# Altium PCB LineSensorBoardPCBRev2.PcbDoc
Units mm, origin at the board's own origin, x right, y up, seen from the top; angles counter-clockwise.
Board outline 50 x 70 mm, 2 copper layers (Top Layer, Bottom Layer); 77 components, 53 nets, 266 pads, 1 vias.
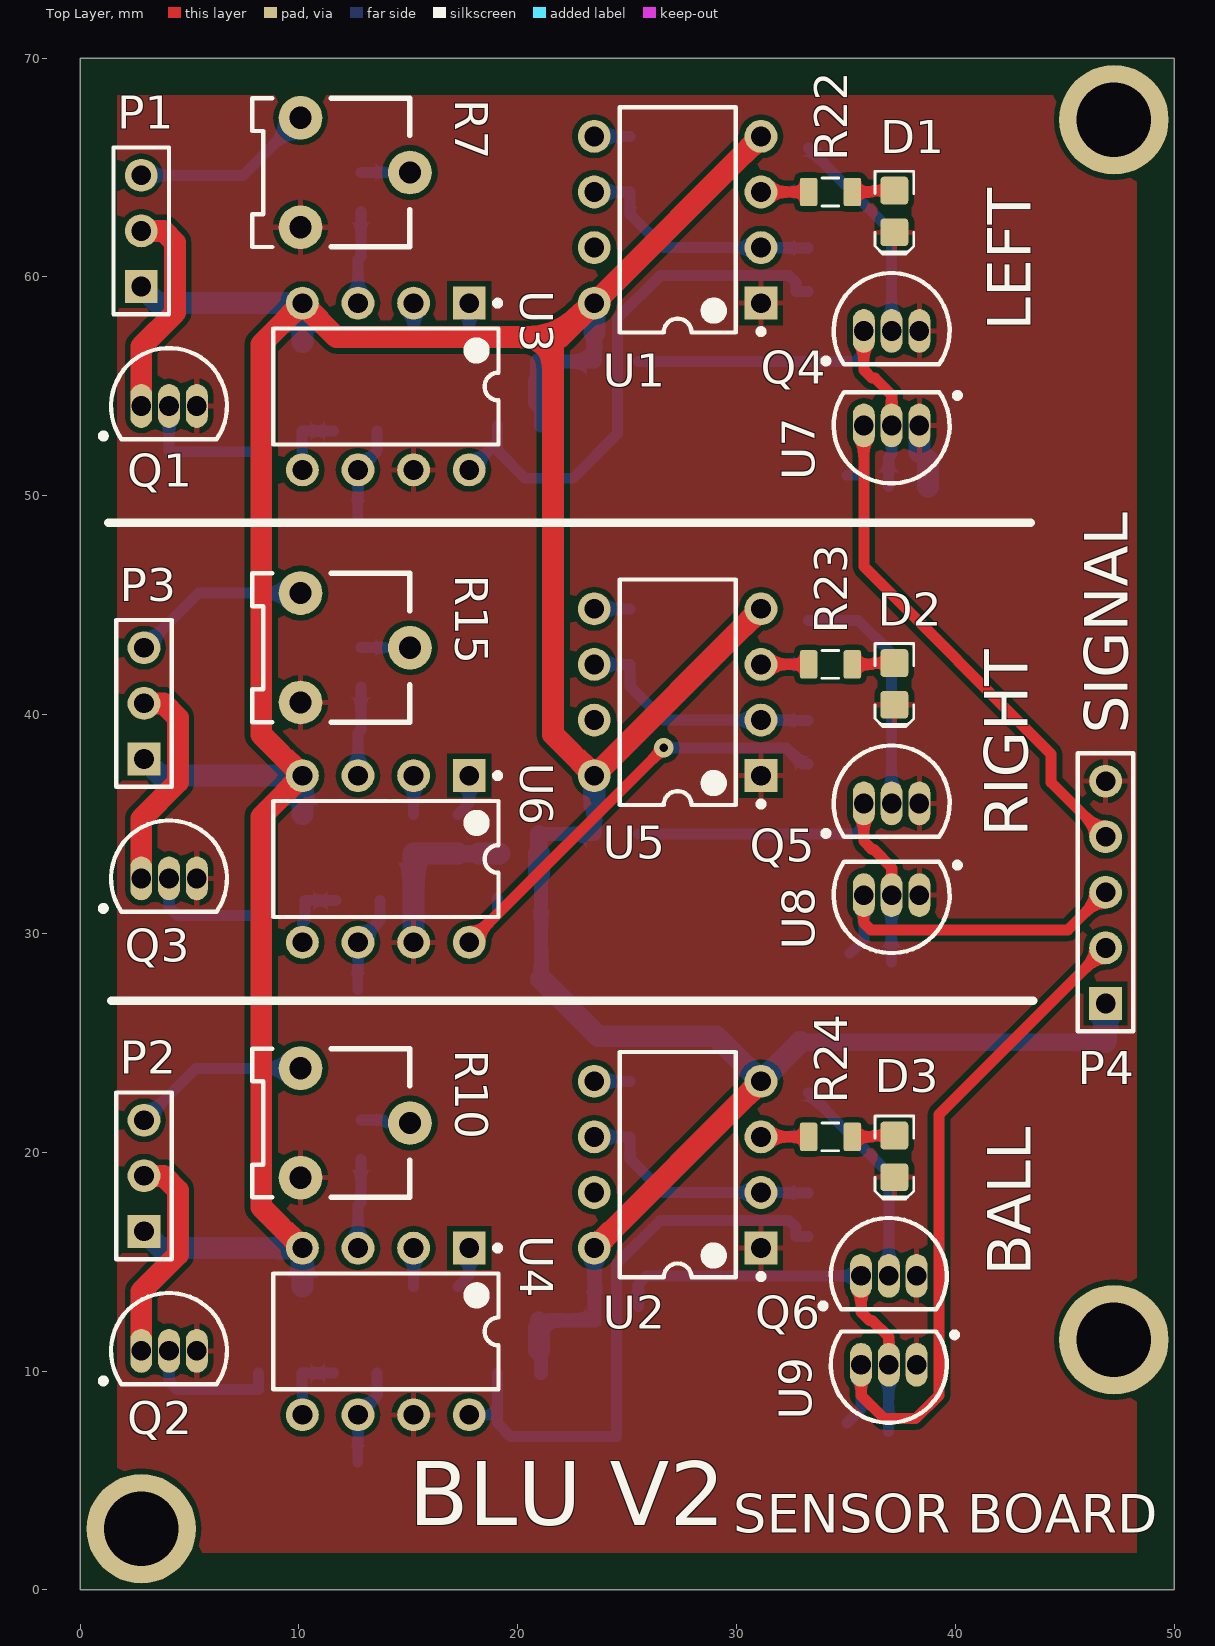
[diagram p0: Top Layer view]
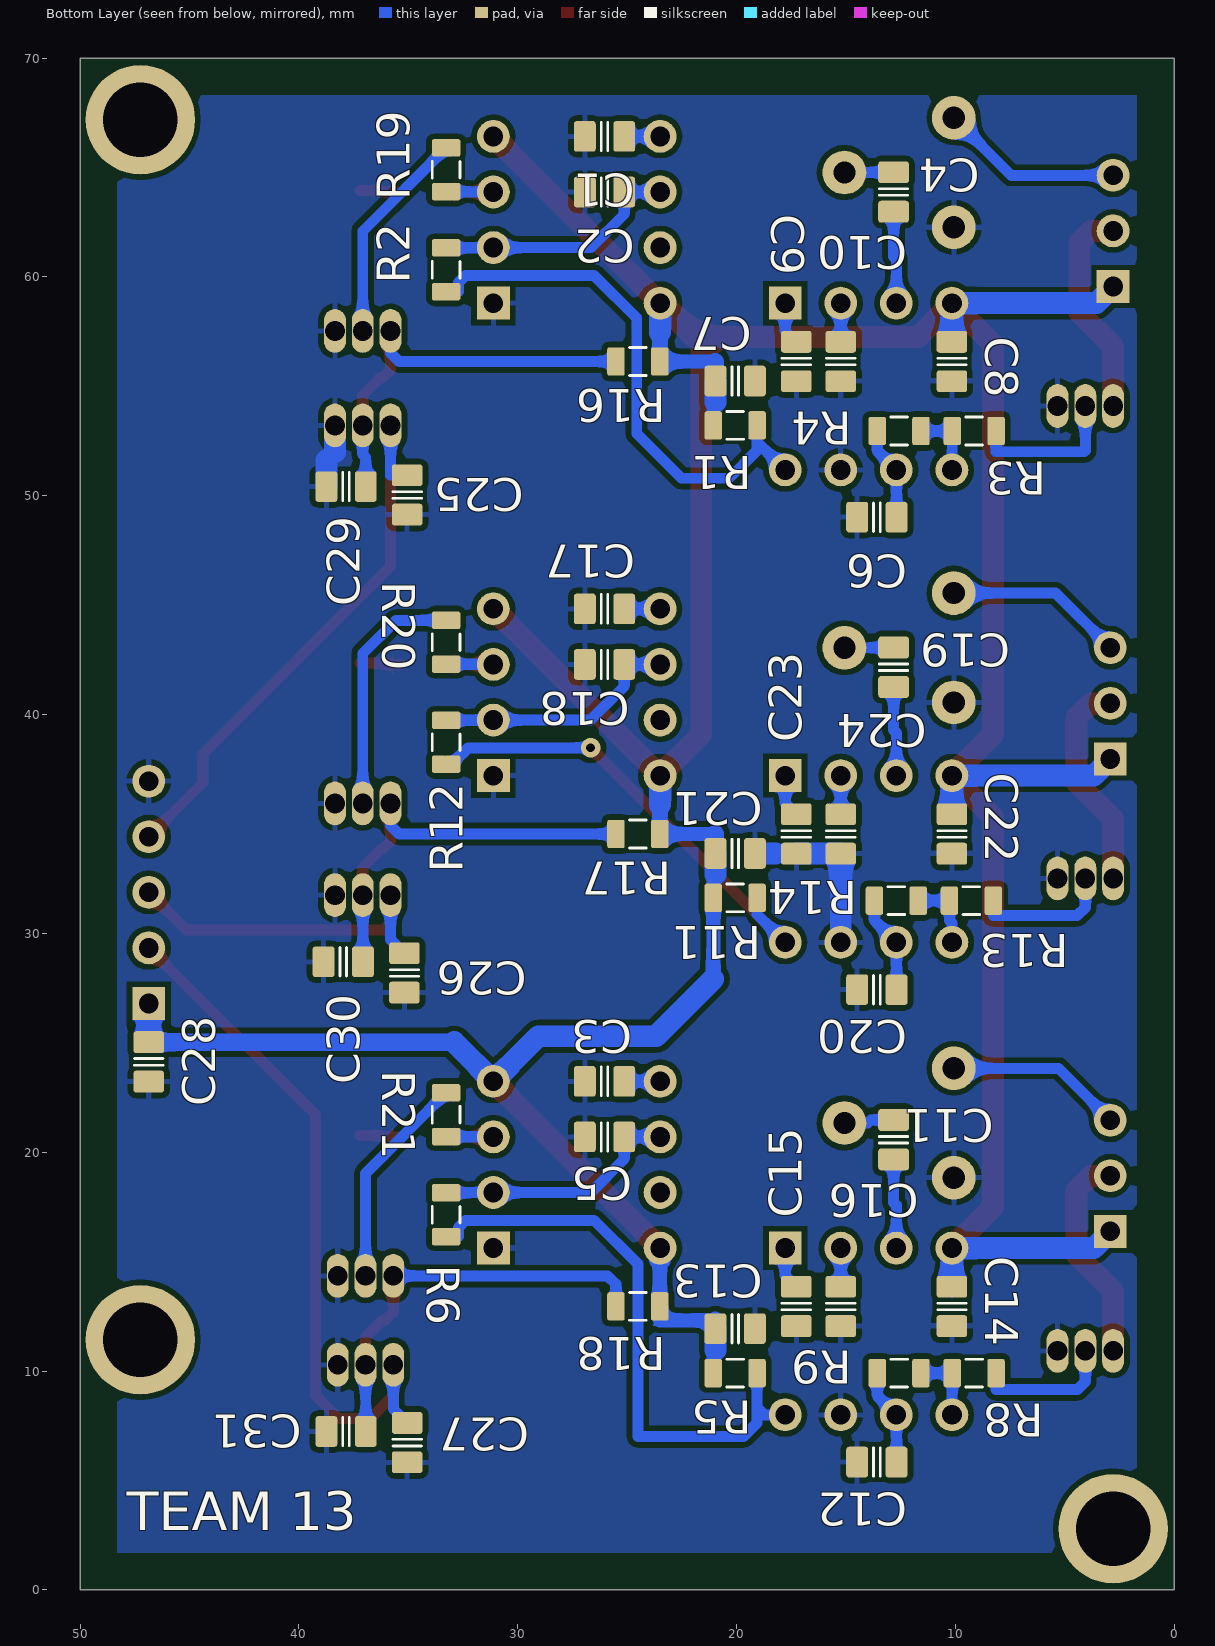
[diagram p1: Bottom Layer view, seen from below]
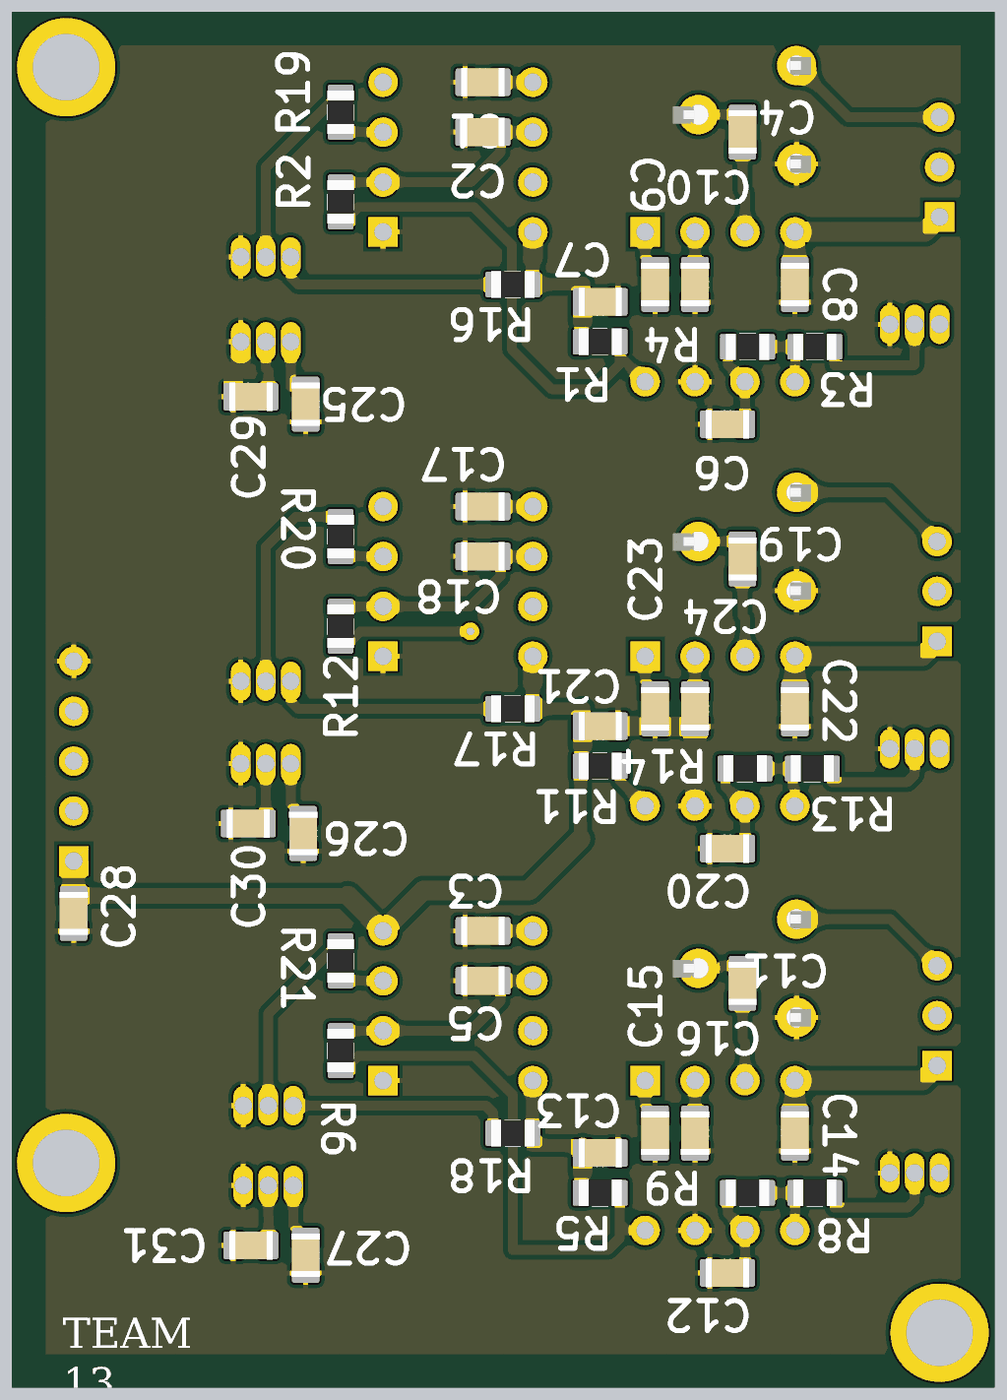
[diagram p2: 3D render of the assembled board from below, using the file's embedded part models]

## Layer stack, top to bottom
Top Solder: solder mask 0.0102, Solder Resist, Dk 3.5
Top Layer: signal copper 0.0356
Dielectric 1: dielectric 0.32, FR-4, Dk 4.8
Bottom Layer: signal copper 0.0356
Bottom Solder: solder mask 0.0102, Solder Resist, Dk 3.5

## Board outline
0,0 50,0 50,70 0,70

## Design rules (kind name [scope] priority, off if disabled: settings)
Clearance [All] p1: gap=0.25
PolygonConnect [All] p1: connectstyle=Relief reliefconductorwidth=0.254 reliefentries=4 polygonreliefangle="90 Angle" airgapwidth=0.254
RoutingVias [All] p1: holewidth=0.4 width=0.9 viastyle="Through Hole" minholewidth=0.711 minwidth=1.27 maxholewidth=0.711 maxwidth=1.27
SMDNeckDown [All] p1: percent=80.000
SolderMaskExpansion [All] p1: expansion=0.102
Width [(InNet('5V') OR InNet('NetP1_2') OR InNet('NetP2_2') OR InNet('NetP3_2') OR InNet('GND'))] p1: maxlimit=1.5 minlimit=0.8 preferedwidth=1 minimp=50.000000 maximp=50.000000 favimp=50.000000
Width Width_All [All] p2: maxlimit=1.5 minlimit=0.3 preferedwidth=0.5 minimp=50.000000 maximp=50.000000 favimp=50.000000
30 further rules are at their usual default settings.

## Components (designator, comment, footprint, x,y, rotation, side; value= is the part's Value field where it differs from the comment)
C1 "approved sub OK" CAPC2012X135N 26.035,66.421 r0 bottom
C2 "approved sub OK" CAPC2012X135N 26.035,63.881 r0 bottom
C3 "approved sub OK" CAPC2012X135N 26.035,23.241 r0 bottom
C4 "approved sub OK" CAPC2012X135N 12.827,63.881 r90 bottom
C5 "approved sub OK" CAPC2012X135N 26.035,20.701 r0 bottom
C6 "approved sub OK" CAPC2012X135N 13.589,49.022 r0 bottom
C7 "approved sub OK" CAPC2012X135N 20.066,55.245 r180 bottom
C8 "approved sub OK" CAPC2012X135N 10.16,56.134 r270 bottom
C9 "approved sub OK" CAPC2012X135N 17.272,56.134 r270 bottom
C10 "approved sub OK" CAPC2012X135N 15.24,56.134 r270 bottom
C11 "approved sub OK" CAPC2012X135N 12.827,20.574 r90 bottom
C12 "approved sub OK" CAPC2012X135N 13.589,5.842 r0 bottom
C13 "approved sub OK" CAPC2012X135N 20.066,11.938 r180 bottom
C14 "approved sub OK" CAPC2012X135N 10.16,12.954 r270 bottom
C15 "approved sub OK" CAPC2012X135N 17.272,12.954 r270 bottom
C16 "approved sub OK" CAPC2012X135N 15.24,12.954 r270 bottom
C17 "approved sub OK" CAPC2012X135N 26.035,44.831 r0 bottom
C18 "approved sub OK" CAPC2012X135N 26.035,42.291 r0 bottom
C19 "approved sub OK" CAPC2012X135N 12.827,42.164 r90 bottom
C20 "approved sub OK" CAPC2012X135N 13.589,27.432 r0 bottom
C21 "approved sub OK" CAPC2012X135N 20.066,33.655 r180 bottom
C22 "approved sub OK" CAPC2012X135N 10.16,34.544 r270 bottom
C23 "approved sub OK" CAPC2012X135N 17.272,34.544 r270 bottom
C24 "approved sub OK" CAPC2012X135N 15.24,34.544 r270 bottom
C25 "approved sub OK" CAPC2012X135N 35.052,50.038 r270 bottom
C26 "approved sub OK" CAPC2012X135N 35.179,28.194 r270 bottom
C27 "approved sub OK" CAPC2012X135N 35.052,6.731 r270 bottom
C28 "approved sub OK" CAPC2012X135N 46.863,24.13 r270 bottom
C29 "approved sub OK" CAPC2012X135N 37.846,50.419 r0 bottom
C30 "approved sub OK" CAPC2012X135N 37.973,28.702 r0 bottom
C31 "approved sub OK" CAPC2012X135N 37.846,7.239 r0 bottom
D1 "INDLED" LED-0805-K 37.211,62.992 r270 top
D2 "INDLED" LED-0805-K 37.211,41.402 r270 top
D3 "INDLED" LED-0805-K 37.211,19.812 r270 top
P1 "LNS_MODULE_HEADER_L" HDR1X3 2.794,59.563 r90 top
P2 "PPP_MODULE_HEADER" HDR1X3 2.921,16.383 r90 top
P3 "LNS_MODULE_HEADER_R" HDR1X3 2.921,37.973 r90 top
P4 "Header 5" HDR1X5 46.863,26.797 r90 top
Q1 "2N2222" TO-226-AA 4.064,54.102 r270 top
Q2 "2N2222" TO-226-AA 4.064,10.922 r270 top
Q3 "2N2222" TO-226-AA 4.064,32.512 r270 top
Q4 "2N2222" TO-226-AA 37.084,57.531 r270 top
Q5 "2N2222" TO-226-AA 37.084,35.941 r270 top
Q6 "2N2222" TO-226-AA 36.957,14.351 r270 top
R1 "Thick Film" RESC2012X70N 20.066,53.213 r180 bottom
R2 "Thick Film" RESC2012X70N 33.274,60.325 r270 bottom
R3 "Thick Film" RESC2012X70N 9.144,52.959 r180 bottom
R4 "Thick Film" RESC2012X70N 12.573,52.959 r0 bottom
R5 "Thick Film" RESC2012X70N 20.066,9.906 r180 bottom
R6 "Thick Film" RESC2012X70N 33.274,17.145 r270 bottom
R7 "Single-turn pot" POT_3306F 12.573,64.77 r270 top
R8 "Thick Film" RESC2012X70N 9.144,9.906 r180 bottom
R9 "Thick Film" RESC2012X70N 12.573,9.906 r0 bottom
R10 "Single-turn pot" POT_3306F 12.573,21.336 r270 top
R11 "Thick Film" RESC2012X70N 20.066,31.623 r180 bottom
R12 "Thick Film" RESC2012X70N 33.274,38.735 r270 bottom
R13 "Thick Film" RESC2012X70N 9.271,31.496 r180 bottom
R14 "Thick Film" RESC2012X70N 12.7,31.496 r0 bottom
R15 "Single-turn pot" POT_3306F 12.573,43.053 r270 top
R16 "Thick Film" RESC2012X70N 24.511,56.134 r180 bottom
R17 "Thick Film" RESC2012X70N 24.511,34.544 r180 bottom
R18 "Thick Film" RESC2012X70N 24.511,12.954 r180 bottom
R19 "Thick Film" RESC2012X70N 33.274,64.897 r90 bottom
R20 "Thick Film" RESC2012X70N 33.274,43.307 r90 bottom
R21 "Thick Film" RESC2012X70N 33.274,21.717 r90 bottom
R22 "Thick Film" RESC2012X70N 34.29,63.881 r180 top
R23 "Thick Film" RESC2012X70N 34.29,42.291 r180 top
R24 "Thick Film" RESC2012X70N 34.29,20.701 r180 top
U1 "LM555CN/NOPB" N08E 27.305,62.611 r180 top
U2 "LM555CN/NOPB" N08E 27.305,19.431 r180 top
U3 "LM567CN/NOPB" N08E 13.97,54.991 r270 top
U4 "LM567CN/NOPB" N08E 13.97,11.811 r270 top
U5 "LM555CN/NOPB" N08E 27.305,41.021 r180 top
U6 "LM567CN/NOPB" N08E 13.97,33.401 r270 top
U7 "MCP1702-3302E/TO" TO-92-TO3 37.084,53.213 r90 top
U8 "MCP1702-3302E/TO" TO-92-TO3 37.084,31.75 r90 top
U9 "MCP1702-3302E/TO" TO-92-TO3 36.957,10.287 r90 top

## Footprints (in the part's own frame and the unit in brackets; to place one, negate y for a bottom-side part, rotate by r counter-clockwise, add the part's x,y. Pads: shape width x height; smd on the part's side, far side on the other; paste and mask are expansions set on the pad)
CAPC2012X135N [mm] "Chip Capacitor, Body 2.0x1.2mm, EIA 0805, IPC Medium Density"
  round 0.254 on Mech15: 0(0,0)
  rrect25% 1x1.4 smd: 1(-0.9,0) 2(0.9,0)
  Top Layer pour cut-out: -0.675,0.7 -0.475,0.9 0.475,0.9 0.675,0.7 0.675,-0.7 0.475,-0.9 -0.475,-0.9 -0.675,-0.7
  silkscreen extent -0.15,-0.65 0.15,0.65, body extent -1.1,-0.72 1.1,0.73, height 1.34
HDR1X3 [mm] "Connector; Header; 3 Position"
  rect 1.5x1.5 hole 0.9: 1(0,0)
  round 1.5 hole 0.9: 2(2.54,0) 3(5.08,0)
  silkscreen extent -1.27,-1.27 6.35,1.27
HDR1X5 [mm] "Connector; Header; 5 Position"
  rect 1.5x1.5 hole 0.9: 1(0,0)
  round 1.5 hole 0.9: 2(2.54,0) 3(5.08,0) 4(7.62,0) 5(10.16,0)
  silkscreen extent -1.27,-1.27 11.43,1.27
LED-0805-K [mil]
  round 20 on Mech15: 0(0,0)
  rrect25% 50x50 smd: A(-37.5,0) K(37.5,0)
  Top Layer pour cut-out: -15,30 15,30 15,-30 -15,-30
  silkscreen extent -72,-35 77,35, body extent -39,-25 39,25, height 31
N08E [mm] "DIP, 8-Pin, Row Spacing 7.62 mm, Pitch 2.54 mm"
  rect 1.5x1.5 hole 0.9: 1(-3.81,3.81)
  round 1.5 hole 0.9: 2(-3.81,1.27) 3(-3.81,-1.27) 4(-3.81,-3.81) 5(3.81,-3.81) 6(3.81,-1.27) 7(3.81,1.27) 8(3.81,3.81)
  silkscreen extent -3.94,-5.15 2.65,5.23, body extent -3.6,-5.15 3.6,5.15, height 5.33
POT_3306F [mm]
  round 2 hole 1.016: CCW(-2.5,-2.5) CW(2.5,-2.5) W(0,2.5)
  silkscreen extent -3.4,-4.7 3.4,2.5, body extent -3.4,-4.88 3.41,3.79, height 7.62
RESC2012X70N [mm] "Chip Resistor, Body 2.0x1.2mm, EIA 0805, IPC Medium Density"
  round 0.254 on Mech15: 0(0,0)
  rrect25% 0.8x1.3 smd: 1(-1,0) 2(1,0)
  Top Layer pour cut-out: -0.725,0.65 -0.525,0.85 0.525,0.85 0.725,0.65 0.725,-0.65 0.525,-0.85 -0.525,-0.85 -0.725,-0.65
  silkscreen extent -0.38,-0.64 0.38,0.64, body extent -1.1,-0.67 1.1,0.68, height 0.69
TO-92-TO3 [mm] "TO, Flat Index; 3 In-Line, Axial Leads; Body Dia. 4.8mm; Leads 0.56 x 0.53 mm (max)"
  oval 2x1 hole 0.9: 1(0,-1.27) 2(0,0) 3(0,1.27)
  silkscreen extent -2.65,-3.13 1.52,2.65, body extent -2.66,-2.66 1.52,2.66, height 5.33
TO-226-AA [mm] "TO, Flat Index; 3 In-Line, Axial Leads; Body Dia. 4.8mm; Leads 0.55 x 0.51 mm (max)"
  oval 2x1 hole 0.9: 1(0,-1.27) 2(0,0) 3(0,1.27)
  silkscreen extent -2.65,-3.13 1.52,2.65, body extent -2.66,-2.66 1.52,2.66, height 5.33

## Part data
C1 C2 C3 C4 C5 C6 C7 C8 C9 C10 C11 C12 C13 C14 C15 C16 C17 C18 C19 C20 C21 C22 C23 C24 C25 C26 C27 C28 C29 C30 C31: library part CAPC_1n8_50V_0805, "Capacitor SMD Cer 1.8nF 10% 50V X7R 0805"
D1 D2 D3: library part LED_SMD_Green_0805_6mcd, "LED, 0805 SMD, Green"
P1 P2 P3: library part "Header 3", "Header, 3-Pin"
P4: "Header, 5-Pin"
Q1 Q2 Q3 Q4 Q5 Q6: library part NPN, "NPN Bipolar Transistor"
R1 R2 R3 R4 R5 R6 R8 R9 R11 R12 R13 R14 R16 R17 R18 R19 R20 R21 R22 R23 R24: library part RES_150R_0805_5%, "Resistor SMD chip 150 Ohm 0.125W 5% 0805"
R7 R10 R15: library part RES_TRIMMER_10K_1T_THT, "Trimmer THD 10K 200mW Single-turn"
U1 U2 U5: library part CMP-0056-00016-2, "Timer, 8-pin MDIP, Pb-Free"
U3 U4 U6: library part CMP-0057-00046-2, "Tone Decoder, 8-pin MDIP, Pb-Free"
U7 U8 U9: library part CMP-0136-00017-1, "250 mA Low Quiescent Current LDO Regulator, 3-Pin TO-92, Extended TemperatureBAG"

## Free pads (board coordinates)
  round 5 hole 3.4: 0(2.794,2.794) 0(47.244,11.43) 0(47.244,67.183)

## Via types
v1: diameter 0.9, hole 0.4, Top Layer to Bottom Layer, 1 vias

## Nets (pads, with @x,y where several pads share a name; then routed paths per layer and width w, separated by ;. In a path a pad name is that pad's centre, name@x,y a point inside that pad or via, vN(x,y) a via of type N, cw(c..) or ccw(c..) an arc to the next point about the centre after c; other vN are vias at no path point)
5V: C7.1 C8.1 C13.1 C14.1 C21.1 C22.1 C28.1 P1.1 P2.1 P3.1 P4.1 R1.1 R5.1 R11.1 R16.2 R17.2 R18.2 U1.4 U1.8 U2.4 U2.8 U3.4 U4.4 U5.4 U5.8 U6.4 | length 203.5
  Top Layer w1: U4.4 8.28,17.501 8.28,35.331 U6.4 8.28,39.091 8.28,56.921 U3.4 11.709,57.252 21.615,57.252 ; U2.8 U2.4 ; U5.4 U5.8 21.615,39.091 21.615,57.252 ; U1.4 U1.8 ; 21.615,57.252 21.946,57.252 U1.8 ; 21.615,57.252 U1.8
  Bottom Layer w0.64: 20.966,10.971 21.066,10.871 R5.1 ; C13.1@20.966,12.319 23.511,12.319 R18.2 U2.8@23.511,15.371 ; 20.966,32.688 21.066,32.588 R11.1 21.066,27.915 ; 20.966,34.544 R17.2 23.511,35.865 ; 20.966,54.278 21.066,54.178 R1.1 ; 20.966,56.134 R16.2 23.511,57.455
  Bottom Layer w0.8: C13.1 C13.1@20.966,12.319 ; C21.1 20.966,34.544 ; C7.1 20.966,56.134 ; 32.904,25.03 C28.1
  Bottom Layer w1: P1.1 3.556,58.801 U3.4 C8.1 ; P2.1 3.683,15.621 U4.4 C14.1 ; P3.1 3.683,37.211 U6.4 C22.1 ; 20.966,10.971 C13.1 ; 20.966,32.688 C21.1 ; 20.966,54.278 C7.1 ; 21.066,27.915 23.682,25.298 29.058,25.298 U2.4 32.904,25.03 ; U2.8@23.495,15.104 U2.8@23.495,15.371 ; U2.8 U2.8@23.495,15.371 ; U5.8 23.495,35.881 23.511,35.865 ; U1.8 23.495,57.471 23.511,57.455 ; U2.8@23.511,15.371 U2.8@23.495,15.371 ; C28.1 P4.1
555SIG_L: R19.1 R22.2 U1.3 | length 4.3
  Top Layer w0.5: U1.3 R22.2
  Bottom Layer w0.5: U1.3 32.182,63.881 32.198,63.897 R19.1
555SIG_PPP: R21.1 R24.2 U2.3 | length 4.3
  Top Layer w0.5: U2.3 R24.2
  Bottom Layer w0.5: U2.3 32.182,20.701 32.198,20.717 R21.1
555SIG_R: R20.1 R23.2 U5.3 | length 4.3
  Top Layer w0.5: U5.3 R23.2
  Bottom Layer w0.5: U5.3 32.182,42.291 32.198,42.307 R20.1
GND: C1.2 C2.2 C3.2 C5.2 C6.2 C7.2 C8.2 C9.2 C10.2 C12.2 C13.2 C14.2 C15.2 C16.2 C17.2 C18.2 C20.2 C21.2 C22.2 C23.2 C24.2 C25.2 C26.2 C27.2 C28.2 C29.2 C30.2 C31.2 D1.K D2.K D3.K P4.5 Q1.3 Q2.3 Q3.3 Q4.3 Q5.3 Q6.3 R7.CW R10.CW R15.CW U1.1 U2.1 U3.7 U4.7 U5.1 U6.7 U7.1 U8.1 U9.1 | length 10.9
  Bottom Layer w0.8: C23.2 18.212,33.644 18.223,33.655 ; 38.354,52.005 38.746,51.613
  Bottom Layer w1: U6.7 C24.2 C23.2 ; 18.223,33.655 C21.2 ; 38.354,52.005 U7.1 ; C29.2 38.746,51.613
LNS_L_SIG: C25.1 P4.4 U7.3 | length 26.4
  Top Layer w0.5: U7.3 35.814,46.761 44.374,38.202 44.374,36.906 P4.4
  Bottom Layer w0.5: C25.1 35.814,50.938 U7.3
LNS_R_SIG: C26.1 P4.3 U8.3 | length 16.1
  Top Layer w0.5: U8.3 35.814,30.48 36.144,30.15 45.136,30.15 P4.3
  Bottom Layer w0.5: C26.1 35.814,29.729 U8.3
NetC1_1: C1.1 U1.5 | length 1.6
  Bottom Layer w0.5: U1.5 C1.1
NetC2_1: C2.1 R2.1 U1.2 U1.6 | length 11.4
  Bottom Layer w0.5: U1.6 C2.1 25.135,62.865 26.659,61.341 U1.2 32.182,61.341 32.198,61.325 R2.1
NetC3_1: C3.1 U2.5 | length 1.6
  Bottom Layer w0.5: U2.5 C3.1
NetC4_1: C4.1 U3.3 | length 4.2
  Bottom Layer w0.5: U3.3 12.7,60.808 12.827,60.935 C4.1
NetC5_1: C5.1 R6.1 U2.2 U2.6 | length 11.4
  Bottom Layer w0.5: U2.6 C5.1 25.135,19.685 26.659,18.161 U2.2 32.182,18.161 32.198,18.145 R6.1
NetC6_1: C6.1 R4.2 U3.6 | length 4.3
  Bottom Layer w0.5: C6.1 12.689,50.089 12.7,50.1 U3.6 13.573,52.054 R4.2
NetC9_1: C9.1 U3.1 | length 2
  Bottom Layer w0.5: C9.1 17.78,57.542 U3.1
NetC10_1: C10.1 U3.2 | length 1.8
  Bottom Layer w0.5: C10.1 U3.2
NetC11_1: C11.1 U4.3 | length 4.1
  Bottom Layer w0.5: U4.3 12.7,17.577 12.827,17.704 C11.1
NetC12_1: C12.1 R9.2 U4.6 | length 4.4
  Bottom Layer w0.5: C12.1 12.689,6.909 12.7,6.92 U4.6 13.573,8.874 R9.2
NetC15_1: C15.1 U4.1 | length 2
  Bottom Layer w0.5: C15.1 17.78,14.362 U4.1
NetC16_1: C16.1 U4.2 | length 1.8
  Bottom Layer w0.5: C16.1 U4.2
NetC17_1: C17.1 U5.5 | length 1.6
  Bottom Layer w0.5: U5.5 C17.1
NetC18_1: C18.1 R12.1 U5.2 U5.6 | length 11.4
  Bottom Layer w0.5: U5.6 C18.1 25.135,41.286 26.67,39.751 U5.2 32.182,39.751 32.198,39.735 R12.1
NetC19_1: C19.1 U6.3 | length 4.1
  Bottom Layer w0.5: U6.3 12.7,39.167 12.827,39.294 C19.1
NetC20_1: C20.1 R14.2 U6.6 | length 4.5
  Bottom Layer w0.5: C20.1 12.689,28.499 12.7,28.51 U6.6 13.7,30.591 R14.2
NetC23_1: C23.1 U6.1 | length 2
  Bottom Layer w0.5: C23.1 17.78,35.952 U6.1
NetC24_1: C24.1 U6.2 | length 1.8
  Bottom Layer w0.5: C24.1 U6.2
NetC29_1: C29.1 Q4.1 R16.1 U7.2 | length 19.2
  Top Layer w0.5: Q4.1 35.814,55.753 36.195,55.372 36.322,55.372 37.084,54.61 U7.2
  Bottom Layer w0.5: R16.1 35.433,56.134 35.814,56.515 Q4.1 ; C29.1 36.946,51.74 37.084,51.878 U7.2
NetC30_1: C30.1 Q5.1 R17.1 U8.2 | length 19.3
  Top Layer w0.5: Q5.1 35.814,34.214 36.195,33.833 36.271,33.833 37.084,33.02 U8.2
  Bottom Layer w0.5: R17.1 35.433,34.544 35.814,34.925 Q5.1 ; C30.1 37.073,30.201 37.084,30.212 U8.2
NetC31_1: C31.1 Q6.1 R18.1 U9.2 | length 19.1
  Top Layer w0.5: Q6.1 35.687,12.7 36.068,12.319 36.195,12.319 36.957,11.557 U9.2
  Bottom Layer w0.5: R18.1 25.511,13.97 25.892,14.351 Q6.1 ; C31.1 36.946,8.738 36.957,8.749 U9.2
NetD1_A: D1.A R22.1 | length 1.9
  Top Layer w0.5: R22.1 36.195,63.881 36.258,63.944 D1.A
NetD2_A: D2.A R23.1 | length 1.9
  Top Layer w0.5: R23.1 36.195,42.291 36.258,42.355 D2.A
NetD3_A: D3.A R24.1 | length 1.9
  Top Layer w0.5: R24.1 36.195,20.701 36.258,20.764 D3.A
NetP1_2: P1.2 Q1.1 | length 9.9
  Top Layer w1: Q1.1 2.794,56.82 4.343,58.369 4.343,61.57 3.81,62.103 P1.2
NetP1_3: P1.3 R7.CCW | length 8.4
  Bottom Layer w0.5: P1.3 7.446,64.643 R7.CCW
NetP2_2: P2.2 Q2.1 | length 9.9
  Top Layer w1: Q2.1 2.794,13.64 4.47,15.316 4.47,18.263 3.81,18.923 P2.2
NetP2_3: P2.3 R10.CCW | length 8.1
  Bottom Layer w0.5: P2.3 5.294,23.836 R10.CCW
NetP3_2: P3.2 Q3.1 | length 9.9
  Top Layer w1: Q3.1 2.794,35.23 4.47,36.906 4.47,39.853 3.81,40.513 P3.2
NetP3_3: P3.3 R15.CCW | length 8.2
  Bottom Layer w0.5: P3.3 5.421,45.553 R15.CCW
NetQ1_2: Q1.2 R3.2 | length 7.1
  Bottom Layer w0.5: Q1.2 4.064,52.07 4.124,52.01 8.144,52.01 R3.2
NetQ2_2: Q2.2 R8.2 | length 6.4
  Bottom Layer w0.5: Q2.2 4.064,9.525 4.429,9.16 8.144,9.16 R8.2
NetQ3_2: Q3.2 R13.2 | length 6.4
  Bottom Layer w0.5: Q3.2 4.064,31.191 4.445,30.81 8.271,30.81 R13.2
NetQ4_2: Q4.2 R19.2 | length 9.9
  Bottom Layer w0.5: R19.2 37.084,62.087 Q4.2
NetQ5_2: Q5.2 R20.2 | length 11.3
  Bottom Layer w0.5: R20.2 35.56,44.307 37.084,42.783 Q5.2
NetQ6_2: Q6.2 R21.2 | length 9.9
  Bottom Layer w0.5: R21.2 36.957,19.034 Q6.2
NetR1_2: R1.2 R2.2 U3.8 | length 25.2
  Bottom Layer w0.5: U3.8 19.066,52.467 ; R1.2 19.066,52.467 ; R2.2 32.715,59.325 32.715,59.741 32.385,60.071 26.518,60.071 24.562,58.115 24.562,52.841 22.52,50.8 20.336,50.8 19.066,52.07 19.066,52.467
NetR3_1: R3.1 R4.1 U3.5 | length 3.2
  Bottom Layer w0.5: U3.5 10.16,52.045 10.144,52.061 R3.1 R4.1
NetR5_2: R5.2 R6.2 U4.8 | length 27.4
  Bottom Layer w0.5: U4.8 18.732,8.001 19.066,8.335 ; R5.2 19.066,9.002 19.066,8.335 ; R6.2 32.715,16.145 32.715,16.561 32.385,16.891 26.518,16.891 24.511,14.884 24.511,7.01 19.676,7.01 19.066,7.62 19.066,8.335
NetR8_1: R8.1 R9.1 U4.5 | length 3.3
  Bottom Layer w0.5: U4.5 10.16,8.941 10.144,8.957 R8.1 R9.1
NetR11_2: R11.2 R12.2 U6.8 | length 22.1
  Top Layer w0.5: U6.8 v1(26.67,38.481)
  Bottom Layer w0.5: U6.8 19.066,30.877 R11.2 ; v1(26.67,38.481) 32.274,38.481 33.02,37.735 R12.2
NetR13_1: R13.1 R14.1 U6.5 | length 3.4
  Bottom Layer w0.5: U6.5 10.16,30.48 10.271,30.591 R13.1 R14.1
PPP_SIG: C27.1 P4.2 U9.3 | length 32.4
  Top Layer w0.5: U9.3 35.687,8.89 36.754,7.823 38.176,7.823 39.243,8.89 39.243,21.717 P4.2
  Bottom Layer w0.5: C27.1 35.687,8.266 U9.3
SENSE_SIG_L: C4.2 R7.W | length 2.3
  Bottom Layer w0.5: C4.2 13.919,64.781 13.93,64.77 R7.W
SENSE_SIG_PPP: C11.2 R10.W | length 2.3
  Bottom Layer w0.5: C11.2 13.868,21.474 14.006,21.336 R10.W
SENSE_SIG_R: C19.2 R15.W | length 2.3
  Bottom Layer w0.5: C19.2 13.919,43.064 13.93,43.053 R15.W
pads on no net: C1.0 C2.0 C3.0 C4.0 C5.0 C6.0 C7.0 C8.0 C9.0 C10.0 C11.0 C12.0 C13.0 C14.0 C15.0 C16.0 C17.0 C18.0 C19.0 C20.0 C21.0 C22.0 C23.0 C24.0 C25.0 C26.0 C27.0 C28.0 C29.0 C30.0 C31.0 D1.0 D2.0 D3.0 R1.0 R2.0 R3.0 R4.0 R5.0 R6.0 R8.0 R9.0 R11.0 R12.0 R13.0 R14.0 R16.0 R17.0 R18.0 R19.0 R20.0 R21.0 R22.0 R23.0 R24.0 U1.7 U2.7 U5.7

## Polygon pours and split planes (outlines as drawn)
GND on Top Layer "Top Layer-GND" (solid, pour order 15): 1.3,68.7 48.7,68.7 48.7,1.3 1.3,1.3
GND on Bottom Layer "Bottom Layer-GND" (solid, pour order 17): 1.3,68.7 48.7,68.7 48.7,1.3 1.3,1.3

## Silkscreen, mask and mechanical layers (free items; w line width, h text height)
Top Overlay:
  lines w0.4: 1.3,48.768 43.434,48.768 ; 1.427,26.924 43.561,26.924
  text "LEFT" at 43.434,57.531 h2 r90
  text "SIGNAL" at 47.879,39.116 h2 r90
  text "RIGHT" at 43.307,34.417 h2 r90
  text "BALL" at 43.434,14.351 h2 r90
  text "SENSOR BOARD" at 29.845,2.032 h3
  text "BLU V2" at 15.027,1.987 h5
Bottom Overlay:
  text "TEAM 13" at 47.879,2.159 h3
Mechanical 1:
  the board outline again, w0.3
Drill Drawing:
  text ".LEGEND" at 55.08,5.08 h1.52
  text "Drill Drawing." at 55.08,2.54 h1.52

## Dimensions
1.3,1.3 to 1.3,68.7 on Mechanical 1
1.3,1.3 to 48.7,1.3 on Mechanical 1